# Altium PCB pcb.PcbDoc
Units mm, origin at the board's own origin, x right, y up, seen from the top; angles counter-clockwise.
Board outline 218.44 x 102.87 mm, 2 copper layers (Top Layer, Bottom Layer), stack 1.571 mm thick; 92 components, 51 nets, 287 pads, 52 vias.
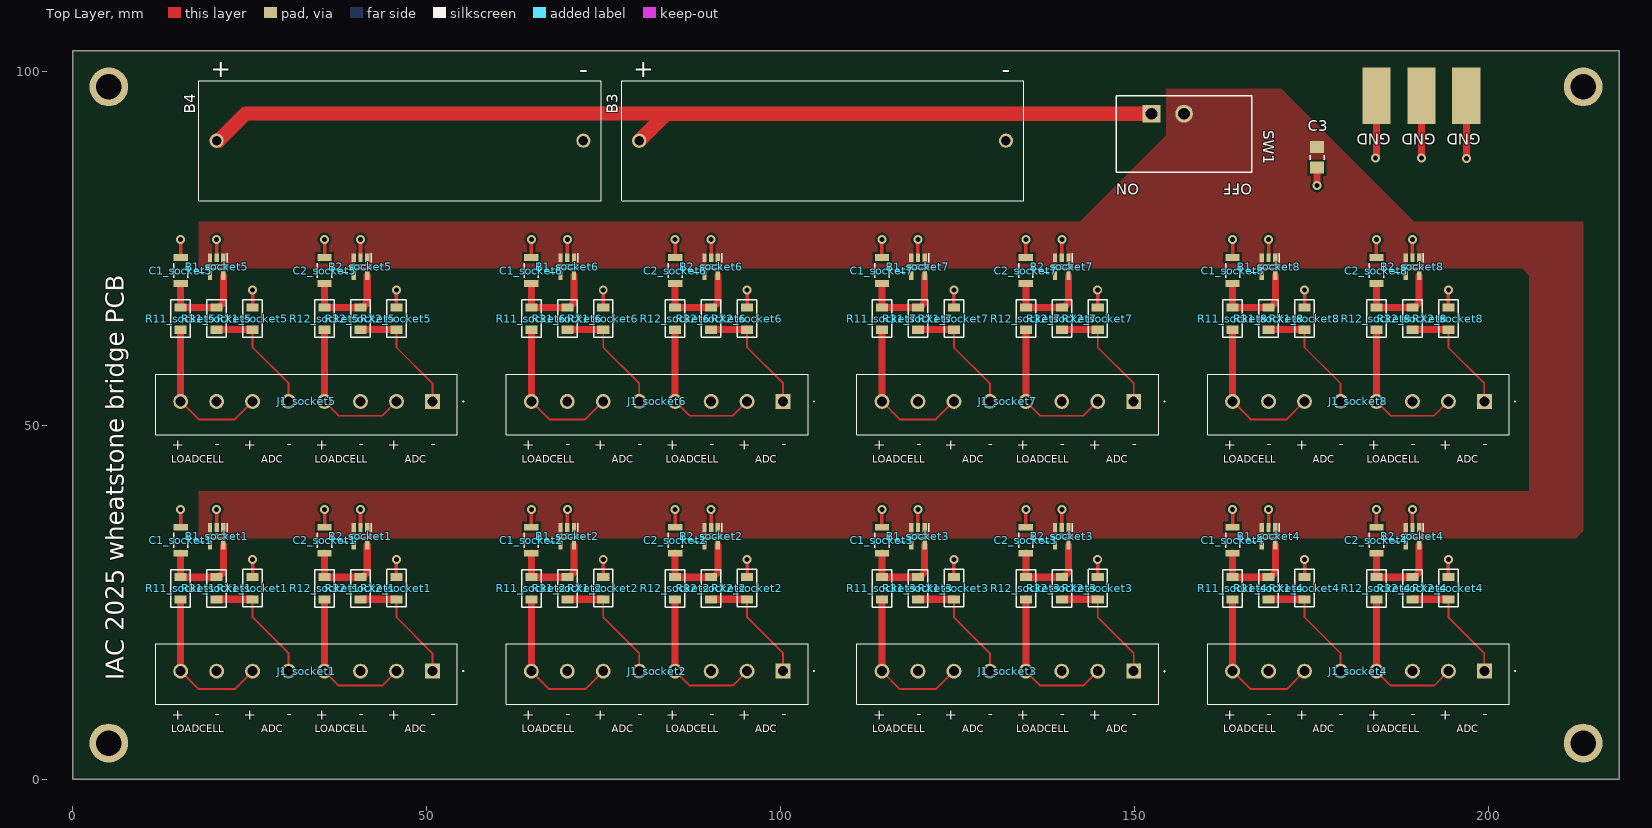
[diagram p0: Top Layer view]
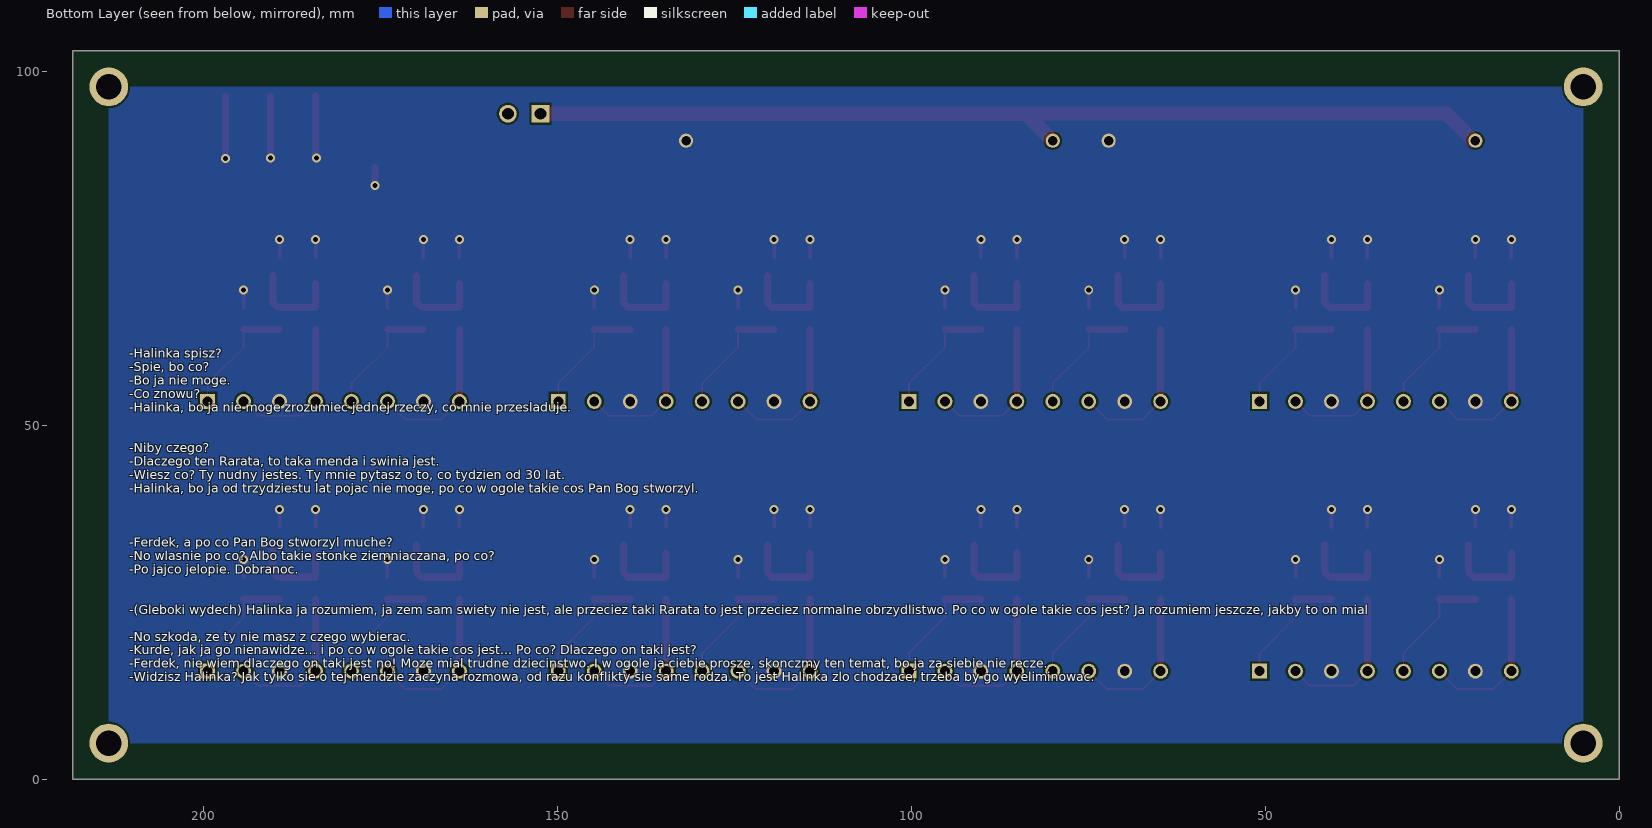
[diagram p1: Bottom Layer view, seen from below]

## Layer stack, top to bottom
Top Solder: solder mask 0.0102, Solder Resist, Dk 3.5
Top Layer: signal copper 0.0356
Dielectric 1: dielectric 1.5, FR-4, Dk 4.8
Bottom Layer: signal copper 0.0356
Bottom Solder: solder mask 0.0102, Solder Resist, Dk 3.5

## Board outline
0,0 0,102.87 218.44,102.87 218.44,0

## Design rules (kind name [scope] priority, off if disabled: settings)
BoardOutlineClearance [All] p1: gap=0.2 ignorepadtopadclearanceinfootprint=FALSE
Clearance [All] p1: gap=0.3 ignorepadtopadclearanceinfootprint=FALSE
ComponentClearance [All] p1: gap=0.01 collisioncheckmode=3 verticalgap=0.01 showdistances=FALSE
HoleSize [All] p1: absolutevalues=TRUE maxlimit=6.3 minlimit=0.15 maxpercent=80.000 minpercent=20.000
MinimumAnnularRing [All] p1: minimumring=0.025
MinimumSolderMaskSliver [All] p1: minsoldermaskwidth=0.1
PolygonConnect [All] p1: connectstyle=Direct reliefconductorwidth=0.254 reliefentries=4 polygonreliefangle="90 Angle" airgapwidth=0.254
RoutingVias [All] p1: holewidth=0.3 width=0.45 viastyle="Through Hole" minholewidth=0.15 minwidth=0.25 maxholewidth=1.5 maxwidth=2
SilkToSolderMaskClearance [IsPad] p1: minsilkscreentomaskgap=0.15 clearancetoexposedcopper=TRUE
SolderMaskExpansion [All] p1: expansion=0.038 istentingtop=FALSE
SupplyNets "Schematic Supply Nets_2" [InNet('GND')] p1: voltage=0.000
SupplyNets "Schematic Supply Nets" [InNet('+5')] p2: voltage=0.000
Width [All] p1: maxlimit=2 minlimit=0.16 preferedwidth=0.254 minimp=50.000000 maximp=50.000000 favimp=50.000000
26 further rules are at their usual default settings.

## Classes and differential pairs
channel class socket_2bridges: socket1 socket2 socket3 socket4 socket5 socket6 socket7 socket8
component class socket8: B1_socket8 B2 B2_socket8 C1_socket8 C2 C2_socket8 J1 J1_socket8 R11 R11_socket8 R12 R12_socket8 R31 R31_socket8 R32 R32_socket8 RX1 RX1_socket8 RX2 RX2_socket8
component class socket7: B1_socket7 B2 B2_socket7 C1_socket7 C2 C2_socket7 J1 J1_socket7 R11 R11_socket7 R12 R12_socket7 R31 R31_socket7 R32 R32_socket7 RX1 RX1_socket7 RX2 RX2_socket7
component class socket6: B1_socket6 B2 B2_socket6 C1_socket6 C2 C2_socket6 J1 J1_socket6 R11 R11_socket6 R12 R12_socket6 R31 R31_socket6 R32 R32_socket6 RX1 RX1_socket6 RX2 RX2_socket6
component class socket5: B1_socket5 B2 B2_socket5 C1_socket5 C2 C2_socket5 J1 J1_socket5 R11 R11_socket5 R12 R12_socket5 R31 R31_socket5 R32 R32_socket5 RX1 RX1_socket5 RX2 RX2_socket5
component class socket4: B1_socket4 B2 B2_socket4 C1_socket4 C2 C2_socket4 J1 J1_socket4 R11 R11_socket4 R12 R12_socket4 R31 R31_socket4 R32 R32_socket4 RX1 RX1_socket4 RX2 RX2_socket4
component class socket3: B1_socket3 B2 B2_socket3 C1_socket3 C2 C2_socket3 J1 J1_socket3 R11 R11_socket3 R12 R12_socket3 R31 R31_socket3 R32 R32_socket3 RX1 RX1_socket3 RX2 RX2_socket3
component class socket2: B1_socket2 B2 B2_socket2 C1_socket2 C2 C2_socket2 J1 J1_socket2 R11 R11_socket2 R12 R12_socket2 R31 R31_socket2 R32 R32_socket2 RX1 RX1_socket2 RX2 RX2_socket2
component class socket1: B1_socket1 B2 B2_socket1 C1_socket1 C2 C2_socket1 J1 J1_socket1 R11 R11_socket1 R12 R12_socket1 R31 R31_socket1 R32 R32_socket1 RX1 RX1_socket1 RX2 RX2_socket1
component class main: B3 B4 C3 SW1

## Components (designator, comment, footprint, x,y, rotation, side; value= is the part's Value field where it differs from the comment)
B1_socket1 "ADPL40502AUJZ-1.2-R7" SOT95P280X100-5N 20.32,34.29 r270 top (schematic designator B1)
B1_socket2 "ADPL40502AUJZ-1.2-R7" SOT95P280X100-5N 69.85,34.29 r270 top (schematic designator B1)
B1_socket3 "ADPL40502AUJZ-1.2-R7" SOT95P280X100-5N 119.38,34.29 r270 top (schematic designator B1)
B1_socket4 "ADPL40502AUJZ-1.2-R7" SOT95P280X100-5N 168.91,34.29 r270 top (schematic designator B1)
B1_socket5 "ADPL40502AUJZ-1.2-R7" SOT95P280X100-5N 20.32,72.39 r270 top (schematic designator B1)
B1_socket6 "ADPL40502AUJZ-1.2-R7" SOT95P280X100-5N 69.85,72.39 r270 top (schematic designator B1)
B1_socket7 "ADPL40502AUJZ-1.2-R7" SOT95P280X100-5N 119.38,72.39 r270 top (schematic designator B1)
B1_socket8 "ADPL40502AUJZ-1.2-R7" SOT95P280X100-5N 168.91,72.39 r270 top (schematic designator B1)
B2_socket1 "ADPL40502AUJZ-1.2-R7" SOT95P280X100-5N 40.64,34.29 r270 top (schematic designator B2)
B2_socket2 "ADPL40502AUJZ-1.2-R7" SOT95P280X100-5N 90.17,34.29 r270 top (schematic designator B2)
B2_socket3 "ADPL40502AUJZ-1.2-R7" SOT95P280X100-5N 139.7,34.29 r270 top (schematic designator B2)
B2_socket4 "ADPL40502AUJZ-1.2-R7" SOT95P280X100-5N 189.23,34.29 r270 top (schematic designator B2)
B2_socket5 "ADPL40502AUJZ-1.2-R7" SOT95P280X100-5N 40.64,72.39 r270 top (schematic designator B2)
B2_socket6 "ADPL40502AUJZ-1.2-R7" SOT95P280X100-5N 90.17,72.39 r270 top (schematic designator B2)
B2_socket7 "ADPL40502AUJZ-1.2-R7" SOT95P280X100-5N 139.7,72.39 r270 top (schematic designator B2)
B2_socket8 "ADPL40502AUJZ-1.2-R7" SOT95P280X100-5N 189.23,72.39 r270 top (schematic designator B2)
B3 "12BH311P-R-GR" 12BH311PRGR 80.01,90.17 r0 top
B4 "12BH311P-R-GR" 12BH311PRGR 20.32,90.17 r0 top
C1_socket1 "1uF" FP-CGA5L-0_3-0_1-IPC_A 15.24,33.735 r90 top (schematic designator C1)
C1_socket2 "1uF" FP-CGA5L-0_3-0_1-IPC_A 64.77,33.735 r90 top (schematic designator C1)
C1_socket3 "1uF" FP-CGA5L-0_3-0_1-IPC_A 114.3,33.735 r90 top (schematic designator C1)
C1_socket4 "1uF" FP-CGA5L-0_3-0_1-IPC_A 163.83,33.735 r90 top (schematic designator C1)
C1_socket5 "1uF" FP-CGA5L-0_3-0_1-IPC_A 15.24,71.835 r90 top (schematic designator C1)
C1_socket6 "1uF" FP-CGA5L-0_3-0_1-IPC_A 64.77,71.835 r90 top (schematic designator C1)
C1_socket7 "1uF" FP-CGA5L-0_3-0_1-IPC_A 114.3,71.835 r90 top (schematic designator C1)
C1_socket8 "1uF" FP-CGA5L-0_3-0_1-IPC_A 163.83,71.835 r90 top (schematic designator C1)
C2_socket1 "1uF" FP-CGA5L-0_3-0_1-IPC_A 35.56,33.735 r90 top (schematic designator C2)
C2_socket2 "1uF" FP-CGA5L-0_3-0_1-IPC_A 85.09,33.735 r90 top (schematic designator C2)
C2_socket3 "1uF" FP-CGA5L-0_3-0_1-IPC_A 134.62,33.735 r90 top (schematic designator C2)
C2_socket4 "1uF" FP-CGA5L-0_3-0_1-IPC_A 184.15,33.735 r90 top (schematic designator C2)
C2_socket5 "1uF" FP-CGA5L-0_3-0_1-IPC_A 35.56,71.835 r90 top (schematic designator C2)
C2_socket6 "1uF" FP-CGA5L-0_3-0_1-IPC_A 85.09,71.835 r90 top (schematic designator C2)
C2_socket7 "1uF" FP-CGA5L-0_3-0_1-IPC_A 134.62,71.835 r90 top (schematic designator C2)
C2_socket8 "1uF" FP-CGA5L-0_3-0_1-IPC_A 184.15,71.835 r90 top (schematic designator C2)
C3 "EMK316BC6226ML-T" FP-1206-L_3_2_0_3-W_1_6_0-IPC_A 175.768,87.81 r270 top
J1_socket1 "1755794" 1755794 50.8,15.24 r180 top (schematic designator J1)
J1_socket2 "1755794" 1755794 100.33,15.24 r180 top (schematic designator J1)
J1_socket3 "1755794" 1755794 149.86,15.24 r180 top (schematic designator J1)
J1_socket4 "1755794" 1755794 199.39,15.24 r180 top (schematic designator J1)
J1_socket5 "1755794" 1755794 50.8,53.34 r180 top (schematic designator J1)
J1_socket6 "1755794" 1755794 100.33,53.34 r180 top (schematic designator J1)
J1_socket7 "1755794" 1755794 149.86,53.34 r180 top (schematic designator J1)
J1_socket8 "1755794" 1755794 199.39,53.34 r180 top (schematic designator J1)
R11_socket1 "AR06BTCV1000" AR06 15.24,26.95 r90 top (schematic designator R11)
R11_socket2 "AR06BTCV1000" AR06 64.77,26.95 r90 top (schematic designator R11)
R11_socket3 "AR06BTCV1000" AR06 114.3,26.95 r90 top (schematic designator R11)
R11_socket4 "AR06BTCV1000" AR06 163.83,26.95 r90 top (schematic designator R11)
R11_socket5 "AR06BTCV1000" AR06 15.24,65.05 r90 top (schematic designator R11)
R11_socket6 "AR06BTCV1000" AR06 64.77,65.05 r90 top (schematic designator R11)
R11_socket7 "AR06BTCV1000" AR06 114.3,65.05 r90 top (schematic designator R11)
R11_socket8 "AR06BTCV1000" AR06 163.83,65.05 r90 top (schematic designator R11)
R12_socket1 "AR06BTCV1000" AR06 35.56,26.95 r90 top (schematic designator R12)
R12_socket2 "AR06BTCV1000" AR06 85.09,26.95 r90 top (schematic designator R12)
R12_socket3 "AR06BTCV1000" AR06 134.62,26.95 r90 top (schematic designator R12)
R12_socket4 "AR06BTCV1000" AR06 184.15,26.95 r90 top (schematic designator R12)
R12_socket5 "AR06BTCV1000" AR06 35.56,65.05 r90 top (schematic designator R12)
R12_socket6 "AR06BTCV1000" AR06 85.09,65.05 r90 top (schematic designator R12)
R12_socket7 "AR06BTCV1000" AR06 134.62,65.05 r90 top (schematic designator R12)
R12_socket8 "AR06BTCV1000" AR06 184.15,65.05 r90 top (schematic designator R12)
R31_socket1 "AR06BTCV1000" AR06 20.32,26.95 r90 top (schematic designator R31)
R31_socket2 "AR06BTCV1000" AR06 69.85,26.95 r90 top (schematic designator R31)
R31_socket3 "AR06BTCV1000" AR06 119.38,26.95 r90 top (schematic designator R31)
R31_socket4 "AR06BTCV1000" AR06 168.91,26.95 r90 top (schematic designator R31)
R31_socket5 "AR06BTCV1000" AR06 20.32,65.05 r90 top (schematic designator R31)
R31_socket6 "AR06BTCV1000" AR06 69.85,65.05 r90 top (schematic designator R31)
R31_socket7 "AR06BTCV1000" AR06 119.38,65.05 r90 top (schematic designator R31)
R31_socket8 "AR06BTCV1000" AR06 168.91,65.05 r90 top (schematic designator R31)
R32_socket1 "AR06BTCV1000" AR06 40.64,26.95 r90 top (schematic designator R32)
R32_socket2 "AR06BTCV1000" AR06 90.17,26.95 r90 top (schematic designator R32)
R32_socket3 "AR06BTCV1000" AR06 139.7,26.95 r90 top (schematic designator R32)
R32_socket4 "AR06BTCV1000" AR06 189.23,26.95 r90 top (schematic designator R32)
R32_socket5 "AR06BTCV1000" AR06 40.64,65.05 r90 top (schematic designator R32)
R32_socket6 "AR06BTCV1000" AR06 90.17,65.05 r90 top (schematic designator R32)
R32_socket7 "AR06BTCV1000" AR06 139.7,65.05 r90 top (schematic designator R32)
R32_socket8 "AR06BTCV1000" AR06 189.23,65.05 r90 top (schematic designator R32)
RX1_socket1 "AR06BTCV4R70" AR06 25.4,26.95 r270 top (schematic designator RX1)
RX1_socket2 "AR06BTCV4R70" AR06 74.93,26.95 r270 top (schematic designator RX1)
RX1_socket3 "AR06BTCV4R70" AR06 124.46,26.95 r270 top (schematic designator RX1)
RX1_socket4 "AR06BTCV4R70" AR06 173.99,26.95 r270 top (schematic designator RX1)
RX1_socket5 "AR06BTCV4R70" AR06 25.4,65.05 r270 top (schematic designator RX1)
RX1_socket6 "AR06BTCV4R70" AR06 74.93,65.05 r270 top (schematic designator RX1)
RX1_socket7 "AR06BTCV4R70" AR06 124.46,65.05 r270 top (schematic designator RX1)
RX1_socket8 "AR06BTCV4R70" AR06 173.99,65.05 r270 top (schematic designator RX1)
RX2_socket1 "AR06BTCV4R70" AR06 45.72,26.95 r270 top (schematic designator RX2)
RX2_socket2 "AR06BTCV4R70" AR06 95.25,26.95 r270 top (schematic designator RX2)
RX2_socket3 "AR06BTCV4R70" AR06 144.78,26.95 r270 top (schematic designator RX2)
RX2_socket4 "AR06BTCV4R70" AR06 194.31,26.95 r270 top (schematic designator RX2)
RX2_socket5 "AR06BTCV4R70" AR06 45.72,65.05 r270 top (schematic designator RX2)
RX2_socket6 "AR06BTCV4R70" AR06 95.25,65.05 r270 top (schematic designator RX2)
RX2_socket7 "AR06BTCV4R70" AR06 144.78,65.05 r270 top (schematic designator RX2)
RX2_socket8 "AR06BTCV4R70" AR06 194.31,65.05 r270 top (schematic designator RX2)
SW1 "L101011MS02Q" FP-L101011MS02Q-MFG 156.972,91.13 r270 top

## Footprints (in the part's own frame and the unit in brackets; to place one, negate y for a bottom-side part, rotate by r counter-clockwise, add the part's x,y. Pads: shape width x height; smd on the part's side, far side on the other; paste and mask are expansions set on the pad)
12BH311PRGR [mm]
  round 1.995 hole 1.33: 1(0,0) 2(51.8,0)
  silkscreen extent -2.5,-8.45 54.3,8.45, body extent -2.61,-8.38 54.29,8.51, height 13
1755794 [mm]
  rect 2.1x2.1 hole 1.4: 1(0,0)
  round 2.1 hole 1.4: 2(5.08,0) 3(10.16,0) 4(15.24,0) 5(20.32,0) 6(25.4,0) 7(30.48,0) 8(35.56,0)
  silkscreen extent -4.4,-3.87 39.1,4.7, body extent -3.4,-4.52 39.24,4.08, height 12.58
AR06 [mm]
  rect 1.15x1.7 smd: 1(-1.575,0) 2(1.575,0)
  silkscreen extent -2.68,-1.38 2.63,1.38, body extent -1.5,-0.75 1.55,0.8, height 0.55
FP-1206-L_3_2_0_3-W_1_6_0-IPC_A [mm]
  rect 1.703x2.004 smd paste+0 mask+0: 1(-1.45,0) 2(1.45,0)
  silkscreen extent -0.3,-1 0.3,1, body extent -2.8,-1.5 2.8,1.5, height 0.25
FP-CGA5L-0_3-0_1-IPC_A [mm]
  rect 0.956x2.006 smd paste+0 mask+0: 1(-1.825,0) 2(1.825,0)
  silkscreen extent -1.05,-1 1.05,1, body extent -2.8,-1.5 2.8,1.5, height 0.25
FP-L101011MS02Q-MFG [mm]
  rect 2.5x2.5 hole 1.65 paste-2539.97 mask+0: 1(-2.85,-4.6)
  round 2.5 hole 1.65 paste-2539.97 mask+0: 2(-2.85,0)
  silkscreen extent -5.4,-9.55 5.4,9.55, body extent -5.5,-9.65 5.5,9.65, height 0.25
SOT95P280X100-5N [mm]
  rect 1.25x0.6 smd: 1(-1.25,0.95) 2(-1.25,0) 3(-1.25,-0.95) 4(1.25,-0.95) 5(1.25,0.95)
  silkscreen extent -1.88,-1.45 0.28,1.5

## Part data
B1_socket1 B1_socket2 B1_socket3 B1_socket4 B1_socket5 B1_socket6 B1_socket7 B1_socket8 B2_socket1 B2_socket2 B2_socket3 B2_socket4 B2_socket5 B2_socket6 B2_socket7 B2_socket8: "Low Noise, 200mA, CMOS Linear Regulator", Manufacturer_Name="Analog Devices", Datasheet Link=https://www.analog.com/ADPL40502/datasheet, Geometry.Height=1mm, Manufacturer_Part_Number=ADPL40502AUJZ-1.2-R7
B3 B4: "Cylindrical Battery Contacts, Clips, Holders & Springs 1 \"AA\" PC LDS W/RIB", Manufacturer_Name="Eagle Plastic Devices", Geometry.Height=14.4mm, Manufacturer_Part_Number=12BH311P-R-GR, Mouser Part Number=12BH311P-R-GR, Mouser Price/Stock=https://www.mouser.co.uk/ProductDetail/Eagle-Plastic-Devices/12BH311P-R-GR?qs=xlWIvxljzP5Z0EAaeyyPGg%3D%3D
C1_socket1 C1_socket2 C1_socket3 C1_socket4 C1_socket5 C1_socket6 C1_socket7 C1_socket8 C2_socket1 C2_socket2 C2_socket3 C2_socket4 C2_socket5 C2_socket6 C2_socket7 C2_socket8: library part CMP-08246-001699-1, "Cap Ceramic 1uF 25V X7R 10% Pad SMD 1206 +125°C Automotive T/R", Case Code (Imperial)=1206, Case Code (Metric)=3216, Dielectric=X7R, Max Operating Temperature=125°C, Min Operating Temperature=-55°C, Package Quantity=2000, Ratings=AEC-Q200, Tolerance=10%, Voltage Rating=25V, Capacitance=1uF, Case/Package=1206, Composition=Ceramic, Depth=1.6mm, Height=1.6mm, Length=3.2mm, Mount="Surface Mount", Packaging="Tape and Reel", REACH SVHC="No SVHC", Termination=SMD/SMT, Thickness=0.075inch, Voltage Rating (DC)=25V, Weight=0.000571oz, Width=1.6mm
C3: library part CMP-14477-000320-2, "None", Capacitance=22uF, Case Code (Imperial)=1206, Case Code (Metric)=3216, Dielectric=X6S, Max Operating Temperature=105°C, Min Operating Temperature=-55°C, Tolerance=20%, Voltage Rating=16V, Case/Package=1206, Lead Free="Lead Free", Length=0.126inch, Mount="Surface Mount", Packaging="Tape and Reel", Thickness=0.071inch, Width=0.063inch
J1_socket1 J1_socket2 J1_socket3 J1_socket4 J1_socket5 J1_socket6 J1_socket7 J1_socket8: "Connector", Manufacturer_Name="Phoenix Contact", Mouser Part Number=651-1755794, Arrow Part Number=1755794, Arrow Price/Stock=https://www.arrow.com/en/products/1755794/phoenix-contact?utm_currency=USD&region=nac, Datasheet Link=http://www.phoenixcontact.com/de/produkte/1755794/pdf, Height=12.15mm, Manufacturer_Part_Number=1755794, Mouser Price/Stock=https://www.mouser.co.uk/ProductDetail/Phoenix-Contact/1755794?qs=wd%252Bw3mUqFrk%2FIOZ4HDo8lg%3D%3D
SW1: library part CMP-10038-000020-1, "SWITCH SLIDE SPST 4A 125V", Actuator Color=Black, Contact Current Rating=2A, Current Rating=4A, Max Operating Temperature=65°C, Max Voltage Rating (AC)=250V, Max Voltage Rating (DC)=125V, Min Operating Temperature=-30°C, Package Quantity=1, Voltage Rating (DC)=28V, Actuator Length=5.08mm, Actuator Material=Nylon, Actuator Type=Standard, Contact Material=Copper, Contact Plating=Silver, Depth=10.8mm, Electrical Life=10000Cycles, Housing Material=Nylon, Lead Free="Lead Free", Length=19.1mm, Max Current Rating=4A, Mount="Through Hole", Orientation=Straight, Packaging=Bulk, Radiation Hardening=No, RoHS Compliant=Yes, Series=L, Switch Function=On-Off, Switch Travel=3.81mm, Termination="PC Pins", Throw Configuration=SPST, Voltage Rating (AC)=125V

## Free pads (board coordinates)
  round 5.5 hole 3.6: MH1(5.08,5.08) MH2(5.08,97.79) MH3(213.36,97.79) MH4(213.36,5.08)
  rect 4x8 smd: RPI_GND_1(184.15,96.52) RPI_GND_2(190.5,96.52) RPI_GND_3(196.85,96.52)

## Via types
v1: diameter 1.27, hole 0.711, Top Layer to Bottom Layer, 52 vias

## Nets (pads, with @x,y where several pads share a name; then routed paths per layer and width w, separated by ;. In a path a pad name is that pad's centre, name@x,y a point inside that pad or via, vN(x,y) a via of type N, cw(c..) or ccw(c..) an arc to the next point about the centre after c; other vN are vias at no path point)
ADC_N1_socket1: J1_socket1.5 R31_socket1.1 RX1_socket1.2 | length 17.3
  Top Layer w0.254: RX1_socket1.2@25.4,25.4 25.4,22.86 30.48,17.78 J1_socket1.5
  Top Layer w1: R31_socket1.1@20.32,25.4 RX1_socket1.2@25.4,25.4
ADC_N1_socket2: J1_socket2.5 R31_socket2.1 RX1_socket2.2 | length 17.3
  Top Layer w0.254: RX1_socket2.2@74.93,25.4 74.93,22.86 80.01,17.78 J1_socket2.5
  Top Layer w1: R31_socket2.1@69.85,25.4 RX1_socket2.2@74.93,25.4
ADC_N1_socket3: J1_socket3.5 R31_socket3.1 RX1_socket3.2 | length 17.3
  Top Layer w0.254: RX1_socket3.2@124.46,25.4 124.46,22.86 129.54,17.78 J1_socket3.5
  Top Layer w1: R31_socket3.1@119.38,25.4 RX1_socket3.2@124.46,25.4
ADC_N1_socket4: J1_socket4.5 R31_socket4.1 RX1_socket4.2 | length 17.3
  Top Layer w0.254: RX1_socket4.2@173.99,25.4 173.99,22.86 179.07,17.78 J1_socket4.5
  Top Layer w1: R31_socket4.1@168.91,25.4 RX1_socket4.2@173.99,25.4
ADC_N1_socket5: J1_socket5.5 R31_socket5.1 RX1_socket5.2 | length 17.3
  Top Layer w0.254: RX1_socket5.2@25.4,63.5 25.4,60.96 30.48,55.88 J1_socket5.5
  Top Layer w1: R31_socket5.1@20.32,63.5 RX1_socket5.2@25.4,63.5
ADC_N1_socket6: J1_socket6.5 R31_socket6.1 RX1_socket6.2 | length 17.3
  Top Layer w0.254: RX1_socket6.2@74.93,63.5 74.93,60.96 80.01,55.88 J1_socket6.5
  Top Layer w1: R31_socket6.1@69.85,63.5 RX1_socket6.2@74.93,63.5
ADC_N1_socket7: J1_socket7.5 R31_socket7.1 RX1_socket7.2 | length 17.3
  Top Layer w0.254: RX1_socket7.2@124.46,63.5 124.46,60.96 129.54,55.88 J1_socket7.5
  Top Layer w1: R31_socket7.1@119.38,63.5 RX1_socket7.2@124.46,63.5
ADC_N1_socket8: J1_socket8.5 R31_socket8.1 RX1_socket8.2 | length 17.3
  Top Layer w0.254: RX1_socket8.2@173.99,63.5 173.99,60.96 179.07,55.88 J1_socket8.5
  Top Layer w1: R31_socket8.1@168.91,63.5 RX1_socket8.2@173.99,63.5
ADC_N2_socket1: J1_socket1.1 R32_socket1.1 RX2_socket1.2 | length 17.3
  Top Layer w0.254: RX2_socket1.2@45.72,25.4 45.72,22.86 50.8,17.78 J1_socket1.1
  Top Layer w1: R32_socket1.1@40.64,25.4 RX2_socket1.2@45.72,25.4
ADC_N2_socket2: J1_socket2.1 R32_socket2.1 RX2_socket2.2 | length 17.3
  Top Layer w0.254: RX2_socket2.2@95.25,25.4 95.25,22.86 100.33,17.78 J1_socket2.1
  Top Layer w1: R32_socket2.1@90.17,25.4 RX2_socket2.2@95.25,25.4
ADC_N2_socket3: J1_socket3.1 R32_socket3.1 RX2_socket3.2 | length 17.3
  Top Layer w0.254: RX2_socket3.2@144.78,25.4 144.78,22.86 149.86,17.78 J1_socket3.1
  Top Layer w1: R32_socket3.1@139.7,25.4 RX2_socket3.2@144.78,25.4
ADC_N2_socket4: J1_socket4.1 R32_socket4.1 RX2_socket4.2 | length 17.3
  Top Layer w0.254: RX2_socket4.2@194.31,25.4 194.31,22.86 199.39,17.78 J1_socket4.1
  Top Layer w1: R32_socket4.1@189.23,25.4 RX2_socket4.2@194.31,25.4
ADC_N2_socket5: J1_socket5.1 R32_socket5.1 RX2_socket5.2 | length 17.3
  Top Layer w0.254: RX2_socket5.2@45.72,63.5 45.72,60.96 50.8,55.88 J1_socket5.1
  Top Layer w1: R32_socket5.1@40.64,63.5 RX2_socket5.2@45.72,63.5
ADC_N2_socket6: J1_socket6.1 R32_socket6.1 RX2_socket6.2 | length 17.3
  Top Layer w0.254: RX2_socket6.2@95.25,63.5 95.25,60.96 100.33,55.88 J1_socket6.1
  Top Layer w1: R32_socket6.1@90.17,63.5 RX2_socket6.2@95.25,63.5
ADC_N2_socket7: J1_socket7.1 R32_socket7.1 RX2_socket7.2 | length 17.3
  Top Layer w0.254: RX2_socket7.2@144.78,63.5 144.78,60.96 149.86,55.88 J1_socket7.1
  Top Layer w1: R32_socket7.1@139.7,63.5 RX2_socket7.2@144.78,63.5
ADC_N2_socket8: J1_socket8.1 R32_socket8.1 RX2_socket8.2 | length 17.3
  Top Layer w0.254: RX2_socket8.2@194.31,63.5 194.31,60.96 199.39,55.88 J1_socket8.1
  Top Layer w1: R32_socket8.1@189.23,63.5 RX2_socket8.2@194.31,63.5
ADC_P1_socket1: J1_socket1.6 J1_socket1.8 R11_socket1.1 | length 22.4
  Top Layer w0.254: J1_socket1.8 17.78,12.7 22.86,12.7 J1_socket1.6
  Top Layer w1: J1_socket1.8 R11_socket1.1@15.24,25.4
ADC_P1_socket2: J1_socket2.6 J1_socket2.8 R11_socket2.1 | length 22.4
  Top Layer w0.254: J1_socket2.8 67.31,12.7 72.39,12.7 J1_socket2.6
  Top Layer w1: J1_socket2.8 R11_socket2.1@64.77,25.4
ADC_P1_socket3: J1_socket3.6 J1_socket3.8 R11_socket3.1 | length 22.4
  Top Layer w0.254: J1_socket3.8 116.84,12.7 121.92,12.7 J1_socket3.6
  Top Layer w1: J1_socket3.8 R11_socket3.1@114.3,25.4
ADC_P1_socket4: J1_socket4.6 J1_socket4.8 R11_socket4.1 | length 22.4
  Top Layer w0.254: J1_socket4.8 166.37,12.7 171.45,12.7 J1_socket4.6
  Top Layer w1: J1_socket4.8 R11_socket4.1@163.83,25.4
ADC_P1_socket5: J1_socket5.6 J1_socket5.8 R11_socket5.1 | length 22.4
  Top Layer w0.254: J1_socket5.8 17.78,50.8 22.86,50.8 J1_socket5.6
  Top Layer w1: J1_socket5.8 R11_socket5.1@15.24,63.5
ADC_P1_socket6: J1_socket6.6 J1_socket6.8 R11_socket6.1 | length 22.4
  Top Layer w0.254: J1_socket6.8 67.31,50.8 72.39,50.8 J1_socket6.6
  Top Layer w1: J1_socket6.8 R11_socket6.1@64.77,63.5
ADC_P1_socket7: J1_socket7.6 J1_socket7.8 R11_socket7.1 | length 22.4
  Top Layer w0.254: J1_socket7.8 116.84,50.8 121.92,50.8 J1_socket7.6
  Top Layer w1: J1_socket7.8 R11_socket7.1@114.3,63.5
ADC_P1_socket8: J1_socket8.6 J1_socket8.8 R11_socket8.1 | length 22.4
  Top Layer w0.254: J1_socket8.8 166.37,50.8 171.45,50.8 J1_socket8.6
  Top Layer w1: J1_socket8.8 R11_socket8.1@163.83,63.5
ADC_P2_socket1: J1_socket1.2 J1_socket1.4 R12_socket1.1 | length 22
  Top Layer w0.254: J1_socket1.4 37.592,13.208 43.688,13.208 J1_socket1.2
  Top Layer w1: J1_socket1.4 R12_socket1.1@35.56,25.4
ADC_P2_socket2: J1_socket2.2 J1_socket2.4 R12_socket2.1 | length 22
  Top Layer w0.254: J1_socket2.4 87.122,13.208 93.218,13.208 J1_socket2.2
  Top Layer w1: J1_socket2.4 R12_socket2.1@85.09,25.4
ADC_P2_socket3: J1_socket3.2 J1_socket3.4 R12_socket3.1 | length 22
  Top Layer w0.254: J1_socket3.4 136.652,13.208 142.748,13.208 J1_socket3.2
  Top Layer w1: J1_socket3.4 R12_socket3.1@134.62,25.4
ADC_P2_socket4: J1_socket4.2 J1_socket4.4 R12_socket4.1 | length 22
  Top Layer w0.254: J1_socket4.4 186.182,13.208 192.278,13.208 J1_socket4.2
  Top Layer w1: J1_socket4.4 R12_socket4.1@184.15,25.4
ADC_P2_socket5: J1_socket5.2 J1_socket5.4 R12_socket5.1 | length 22
  Top Layer w0.254: J1_socket5.4 37.592,51.308 43.688,51.308 J1_socket5.2
  Top Layer w1: J1_socket5.4 R12_socket5.1@35.56,63.5
ADC_P2_socket6: J1_socket6.2 J1_socket6.4 R12_socket6.1 | length 22
  Top Layer w0.254: J1_socket6.4 87.122,51.308 93.218,51.308 J1_socket6.2
  Top Layer w1: J1_socket6.4 R12_socket6.1@85.09,63.5
ADC_P2_socket7: J1_socket7.2 J1_socket7.4 R12_socket7.1 | length 22
  Top Layer w0.254: J1_socket7.4 136.652,51.308 142.748,51.308 J1_socket7.2
  Top Layer w1: J1_socket7.4 R12_socket7.1@134.62,63.5
ADC_P2_socket8: J1_socket8.2 J1_socket8.4 R12_socket8.1 | length 22
  Top Layer w0.254: J1_socket8.4 186.182,51.308 192.278,51.308 J1_socket8.2
  Top Layer w1: J1_socket8.4 R12_socket8.1@184.15,63.5
LOADCELL_N1_socket1: B1_socket1.2 B1_socket2.2 B1_socket3.2 B1_socket4.2 B1_socket5.2 B1_socket6.2 B1_socket7.2 B1_socket8.2 B2_socket1.2 B2_socket2.2 B2_socket3.2 B2_socket4.2 B2_socket5.2 B2_socket6.2 B2_socket7.2 B2_socket8.2 B3.2 B4.2 C1_socket1.2 C1_socket2.2 C1_socket3.2 C1_socket4.2 C1_socket5.2 C1_socket6.2 C1_socket7.2 C1_socket8.2 C2_socket1.2 C2_socket2.2 C2_socket3.2 C2_socket4.2 C2_socket5.2 C2_socket6.2 C2_socket7.2 C2_socket8.2 C3.2 J1_socket1.3 J1_socket1.7 J1_socket2.3 J1_socket2.7 J1_socket3.3 J1_socket3.7 J1_socket4.3 J1_socket4.7 J1_socket5.3 J1_socket5.7 J1_socket6.3 J1_socket6.7 J1_socket7.3 J1_socket7.7 J1_socket8.3 J1_socket8.7 pad.RPI_GND_1 pad.RPI_GND_2 pad.RPI_GND_3 RX1_socket1.1 RX1_socket2.1 RX1_socket3.1 RX1_socket4.1 RX1_socket5.1 RX1_socket6.1 RX1_socket7.1 RX1_socket8.1 RX2_socket1.1 RX2_socket2.1 RX2_socket3.1 RX2_socket4.1 RX2_socket5.1 RX2_socket6.1 RX2_socket7.1 RX2_socket8.1 | length 150.4
  Top Layer w0.5: C1_socket1.2 v1(15.24,38.1) ; C1_socket5.2 v1(15.24,76.2) ; B1_socket1.2 v1(20.32,38.1) ; B1_socket5.2 v1(20.32,76.2) ; RX1_socket1.1@25.4,28.5 v1(25.4,30.988) ; RX1_socket5.1@25.4,66.6 v1(25.4,69.088) ; C2_socket1.2 v1(35.56,38.1) ; C2_socket5.2 v1(35.56,76.2) ; B2_socket1.2 v1(40.64,38.1) ; B2_socket5.2 v1(40.64,76.2) ; RX2_socket1.1@45.72,28.5 v1(45.72,30.988) ; RX2_socket5.1@45.72,66.6 v1(45.72,69.088) ; C1_socket2.2 v1(64.77,38.1) ; C1_socket6.2 v1(64.77,76.2) ; B1_socket2.2 v1(69.85,38.1) ; B1_socket6.2 v1(69.85,76.2) ; RX1_socket2.1@74.93,28.5 v1(74.93,30.988) ; RX1_socket6.1@74.93,66.6 v1(74.93,69.088) ; C2_socket2.2 v1(85.09,38.1) ; C2_socket6.2 v1(85.09,76.2) ; B2_socket2.2 v1(90.17,38.1) ; B2_socket6.2 v1(90.17,76.2) ; RX2_socket2.1@95.25,28.5 v1(95.25,30.988) ; RX2_socket6.1@95.25,66.6 v1(95.25,69.088) ; C1_socket3.2 v1(114.3,38.1) ; C1_socket7.2 v1(114.3,76.2) ; B1_socket3.2 v1(119.38,38.1) ; B1_socket7.2 v1(119.38,76.2) ; RX1_socket3.1@124.46,28.5 v1(124.46,30.988) ; RX1_socket7.1@124.46,66.6 v1(124.46,69.088) ; C2_socket3.2 v1(134.62,38.1) ; C2_socket7.2 v1(134.62,76.2) ; B2_socket3.2 v1(139.7,38.1) ; B2_socket7.2 v1(139.7,76.2) ; RX2_socket3.1@144.78,28.5 v1(144.78,30.988) ; RX2_socket7.1@144.78,66.6 v1(144.78,69.088) ; C1_socket4.2 v1(163.83,38.1) ; C1_socket8.2 v1(163.83,76.2) ; B1_socket4.2 v1(168.91,38.1) ; B1_socket8.2 v1(168.91,76.2) ; RX1_socket4.1@173.99,28.5 v1(173.99,30.988) ; RX1_socket8.1@173.99,66.6 v1(173.99,69.088) ; C2_socket4.2 v1(184.15,38.1) ; C2_socket8.2 v1(184.15,76.2) ; B2_socket4.2 v1(189.23,38.1) ; B2_socket8.2 v1(189.23,76.2) ; RX2_socket4.1@194.31,28.5 v1(194.31,30.988) ; RX2_socket8.1@194.31,66.6 v1(194.31,69.088)
  Top Layer w1: v1(175.768,83.82) C3.2 ; v1(184.023,87.757) 184.023,87.83 184.15,87.957 pad.RPI_GND_1 ; v1(190.5,87.757) pad.RPI_GND_2 ; v1(196.85,87.63) pad.RPI_GND_3
NetB1_socket1_5: B1_socket1.5 C1_socket1.1 R11_socket1.2 R31_socket1.2 | length 13.3
  Top Layer w1: C1_socket1.1 15.24,28.5 R31_socket1.2@20.32,28.5 ; R31_socket1.2@20.595,28.5 21.27,29.175 B1_socket1.5
NetB1_socket2_5: B1_socket2.5 C1_socket2.1 R11_socket2.2 R31_socket2.2 | length 13.3
  Top Layer w1: C1_socket2.1 64.77,28.5 R31_socket2.2@69.85,28.5 ; R31_socket2.2@70.125,28.5 70.8,29.175 B1_socket2.5
NetB1_socket3_5: B1_socket3.5 C1_socket3.1 R11_socket3.2 R31_socket3.2 | length 13.3
  Top Layer w1: C1_socket3.1 114.3,28.5 R31_socket3.2@119.38,28.5 ; R31_socket3.2@119.655,28.5 120.33,29.175 B1_socket3.5
NetB1_socket4_5: B1_socket4.5 C1_socket4.1 R11_socket4.2 R31_socket4.2 | length 13.3
  Top Layer w1: C1_socket4.1 163.83,28.5 R31_socket4.2@168.91,28.5 ; R31_socket4.2@169.185,28.5 169.86,29.175 B1_socket4.5
NetB1_socket5_5: B1_socket5.5 C1_socket5.1 R11_socket5.2 R31_socket5.2 | length 13.3
  Top Layer w1: C1_socket5.1 15.24,66.6 R31_socket5.2@20.32,66.6 ; R31_socket5.2@20.595,66.6 21.27,67.275 B1_socket5.5
NetB1_socket6_5: B1_socket6.5 C1_socket6.1 R11_socket6.2 R31_socket6.2 | length 13.3
  Top Layer w1: C1_socket6.1 64.77,66.6 R31_socket6.2@69.85,66.6 ; R31_socket6.2@70.125,66.6 70.8,67.275 B1_socket6.5
NetB1_socket7_5: B1_socket7.5 C1_socket7.1 R11_socket7.2 R31_socket7.2 | length 13.3
  Top Layer w1: C1_socket7.1 114.3,66.6 R31_socket7.2@119.38,66.6 ; R31_socket7.2@119.655,66.6 120.33,67.275 B1_socket7.5
NetB1_socket8_5: B1_socket8.5 C1_socket8.1 R11_socket8.2 R31_socket8.2 | length 13.3
  Top Layer w1: C1_socket8.1 163.83,66.6 R31_socket8.2@168.91,66.6 ; R31_socket8.2@169.185,66.6 169.86,67.275 B1_socket8.5
NetB2_socket1_5: B2_socket1.5 C2_socket1.1 R12_socket1.2 R32_socket1.2 | length 13.3
  Top Layer w1: C2_socket1.1 35.56,28.5 40.503,28.5 R32_socket1.2@40.559,28.556 ; R32_socket1.2@40.915,28.5 41.59,29.175 B2_socket1.5
NetB2_socket2_5: B2_socket2.5 C2_socket2.1 R12_socket2.2 R32_socket2.2 | length 13.3
  Top Layer w1: C2_socket2.1 85.09,28.5 90.033,28.5 R32_socket2.2@90.089,28.556 ; R32_socket2.2@90.445,28.5 91.12,29.175 B2_socket2.5
NetB2_socket3_5: B2_socket3.5 C2_socket3.1 R12_socket3.2 R32_socket3.2 | length 13.3
  Top Layer w1: C2_socket3.1 134.62,28.5 139.563,28.5 R32_socket3.2@139.619,28.556 ; R32_socket3.2@139.975,28.5 140.65,29.175 B2_socket3.5
NetB2_socket4_5: B2_socket4.5 C2_socket4.1 R12_socket4.2 R32_socket4.2 | length 13.3
  Top Layer w1: C2_socket4.1 184.15,28.5 189.093,28.5 R32_socket4.2@189.149,28.556 ; R32_socket4.2@189.505,28.5 190.18,29.175 B2_socket4.5
NetB2_socket5_5: B2_socket5.5 C2_socket5.1 R12_socket5.2 R32_socket5.2 | length 13.3
  Top Layer w1: C2_socket5.1 35.56,66.6 40.503,66.6 R32_socket5.2@40.559,66.656 ; R32_socket5.2@40.915,66.6 41.59,67.275 B2_socket5.5
NetB2_socket6_5: B2_socket6.5 C2_socket6.1 R12_socket6.2 R32_socket6.2 | length 13.3
  Top Layer w1: C2_socket6.1 85.09,66.6 90.033,66.6 R32_socket6.2@90.089,66.656 ; R32_socket6.2@90.445,66.6 91.12,67.275 B2_socket6.5
NetB2_socket7_5: B2_socket7.5 C2_socket7.1 R12_socket7.2 R32_socket7.2 | length 13.3
  Top Layer w1: C2_socket7.1 134.62,66.6 139.563,66.6 R32_socket7.2@139.619,66.656 ; R32_socket7.2@139.975,66.6 140.65,67.275 B2_socket7.5
NetB2_socket8_5: B2_socket8.5 C2_socket8.1 R12_socket8.2 R32_socket8.2 | length 13.3
  Top Layer w1: C2_socket8.1 184.15,66.6 189.093,66.6 R32_socket8.2@189.149,66.656 ; R32_socket8.2@189.505,66.6 190.18,67.275 B2_socket8.5
NetB3_1: B3.1 B4.1 SW1.1 | length 139.1
  Top Layer w2: B4.1 20.574,90.17 24.433,94.029 83.82,94.029 83.82,93.98 ; B3.1 83.82,93.98 ; SW1.1 83.82,93.98
VCC: B1_socket1.1 B1_socket1.3 B1_socket2.1 B1_socket2.3 B1_socket3.1 B1_socket3.3 B1_socket4.1 B1_socket4.3 B1_socket5.1 B1_socket5.3 B1_socket6.1 B1_socket6.3 B1_socket7.1 B1_socket7.3 B1_socket8.1 B1_socket8.3 B2_socket1.1 B2_socket1.3 B2_socket2.1 B2_socket2.3 B2_socket3.1 B2_socket3.3 B2_socket4.1 B2_socket4.3 B2_socket5.1 B2_socket5.3 B2_socket6.1 B2_socket6.3 B2_socket7.1 B2_socket7.3 B2_socket8.1 B2_socket8.3 C3.1 SW1.2
pads on no net: B1_socket1.4 B1_socket2.4 B1_socket3.4 B1_socket4.4 B1_socket5.4 B1_socket6.4 B1_socket7.4 B1_socket8.4 B2_socket1.4 B2_socket2.4 B2_socket3.4 B2_socket4.4 B2_socket5.4 B2_socket6.4 B2_socket7.4 B2_socket8.4

## Polygon pours and split planes (outlines as drawn)
LOADCELL_N1_socket1 on Bottom Layer "LOADCELL_N1_SOCKET1_L02_P001" (solid, pour order 1): 5.08,97.79 213.36,97.79 213.36,5.08 5.08,5.08
VCC on Top Layer "VCC_L01_P002" (solid, pour order 2): 17.78,72.136 17.78,78.74 142.24,78.74 154.432,90.932 154.432,97.536 170.688,97.536 189.484,78.74 213.36,78.74 213.36,35.052 212.344,34.036 17.78,34.036 17.78,40.64 205.74,40.64 205.74,71.12 204.724,72.136

## Silkscreen, mask and mechanical layers (free items; w line width, h text height)
Top Overlay:
  text "+" at 19.474,99.145 h2.54
  text "+" at 79.164,99.145 h2.54
  text "-" at 71.544,99.06 h2.54
  text "-" at 131.234,99.06 h2.54
  text "GND" at 186.181,91.186 h1.52 r180
  text "GND" at 192.531,91.186 h1.52 r180
  text "GND" at 198.881,91.186 h1.52 r180
  text "ON" at 150.622,84.074 h1.52 r180
  text "OFF" at 166.623,84.074 h1.52 r180
  text "IAC 2025 wheatstone bridge PCB" at 7.196,13.982 h2.54 r90
Bottom Overlay:
  text "-Halinka spisz? / -Spie, bo co? / -Bo ja nie moge. / -Co znowu? / -Halinka, bo ja nie moge zrozumiec jednej rzeczy, co mnie przesladuje. /  /  / -Niby czego? / -Dlaczego ten Rarata, to taka menda i swinia jest. / -Wiesz co? Ty nudny jestes. Ty mnie pytasz o to, co tydzien od 30 lat. / -Halinka, bo ja od trzydziestu lat pojac nie moge, po co w ogole takie cos Pan Bog stworzyl. /  /  /  / -Ferdek, a po co Pan Bog stworzyl muche? / -No wlasnie po co? Albo takie stonke ziemniaczana, po co? / -Po jajco jelopie. Dobranoc. /  /  / -(Gleboki wydech) Halinka ja rozumiem, ja zem sam swiety nie jest, ale przeciez taki Rarata to jest przeciez normalne obrzydlistwo. Po co w ogole takie cos jest? Ja rozumiem jeszcze, jakby to on mial zle. Ale co, mieszkanie ma, samochod ma, telewizor ma, pieniadze w bankomacie ma. Sam, zem widzial jak wybieral. /  / -No szkoda, ze ty nie masz z czego wybierac. / -Kurde, jak ja go nienawidze... i po co w ogole takie cos jest... Po co? Dlaczego on taki jest? / -Ferdek, nie wiem dlaczego on taki jest no! Moze mial trudne dziecinstwo. I w ogole ja ciebie prosze, skonczmy ten temat, bo ja za siebie nie recze. / -Widzisz Halinka? Jak tylko sie o tej mendzie zaczyna rozmowa, od razu konflikty sie same rodza. To jest Halinka zlo chodzace, trzeba by go wyeliminowac." at 210.477,13.784 h1.27

## Text inside footprints (layer, text, board x,y; h text height)
J1_socket1: Top Overlay "+" at 46.228,9.652 h1.52 r180; Top Overlay "+" at 36.068,9.652 h1.52 r180; Top Overlay "+" at 25.908,9.652 h1.52 r180; Top Overlay "+" at 15.748,9.652 h1.52 r180; Top Overlay "ADC" at 26.586,6.604 h1.02; Top Overlay "LOADCELL" at 13.887,6.604 h1.02; Top Overlay "ADC" at 46.906,6.604 h1.02; Top Overlay "LOADCELL" at 34.207,6.604 h1.02; Top Overlay "-" at 20.828,9.652 h1.52 r180; Top Overlay "-" at 30.988,9.652 h1.52 r180; Top Overlay "-" at 41.148,9.652 h1.52 r180; Top Overlay "-" at 51.308,9.652 h1.52 r180
J1_socket2: Top Overlay "-" at 100.838,9.652 h1.52 r180; Top Overlay "-" at 90.678,9.652 h1.52 r180; Top Overlay "-" at 80.518,9.652 h1.52 r180; Top Overlay "-" at 70.358,9.652 h1.52 r180; Top Overlay "LOADCELL" at 83.737,6.604 h1.02; Top Overlay "ADC" at 96.436,6.604 h1.02; Top Overlay "LOADCELL" at 63.417,6.604 h1.02; Top Overlay "ADC" at 76.116,6.604 h1.02; Top Overlay "+" at 65.278,9.652 h1.52 r180; Top Overlay "+" at 75.438,9.652 h1.52 r180; Top Overlay "+" at 85.598,9.652 h1.52 r180; Top Overlay "+" at 95.758,9.652 h1.52 r180
J1_socket3: Top Overlay "+" at 145.288,9.652 h1.52 r180; Top Overlay "+" at 135.128,9.652 h1.52 r180; Top Overlay "+" at 124.968,9.652 h1.52 r180; Top Overlay "+" at 114.808,9.652 h1.52 r180; Top Overlay "ADC" at 125.646,6.604 h1.02; Top Overlay "LOADCELL" at 112.947,6.604 h1.02; Top Overlay "ADC" at 145.966,6.604 h1.02; Top Overlay "LOADCELL" at 133.267,6.604 h1.02; Top Overlay "-" at 119.888,9.652 h1.52 r180; Top Overlay "-" at 130.048,9.652 h1.52 r180; Top Overlay "-" at 140.208,9.652 h1.52 r180; Top Overlay "-" at 150.368,9.652 h1.52 r180
J1_socket4: Top Overlay "+" at 194.818,9.652 h1.52 r180; Top Overlay "+" at 184.658,9.652 h1.52 r180; Top Overlay "+" at 174.498,9.652 h1.52 r180; Top Overlay "+" at 164.338,9.652 h1.52 r180; Top Overlay "ADC" at 175.176,6.604 h1.02; Top Overlay "LOADCELL" at 162.477,6.604 h1.02; Top Overlay "ADC" at 195.496,6.604 h1.02; Top Overlay "LOADCELL" at 182.797,6.604 h1.02; Top Overlay "-" at 169.418,9.652 h1.52 r180; Top Overlay "-" at 179.578,9.652 h1.52 r180; Top Overlay "-" at 189.738,9.652 h1.52 r180; Top Overlay "-" at 199.898,9.652 h1.52 r180
J1_socket5: Top Overlay "+" at 46.228,47.752 h1.52 r180; Top Overlay "+" at 36.068,47.752 h1.52 r180; Top Overlay "+" at 25.908,47.752 h1.52 r180; Top Overlay "+" at 15.748,47.752 h1.52 r180; Top Overlay "ADC" at 26.586,44.704 h1.02; Top Overlay "ADC" at 46.906,44.704 h1.02; Top Overlay "LOADCELL" at 34.207,44.704 h1.02; Top Overlay "-" at 20.828,47.752 h1.52 r180; Top Overlay "-" at 30.988,47.752 h1.52 r180; Top Overlay "-" at 41.148,47.752 h1.52 r180; Top Overlay "-" at 51.308,47.752 h1.52 r180; Top Overlay "LOADCELL" at 13.887,44.704 h1.02
J1_socket6: Top Overlay "+" at 95.758,47.752 h1.52 r180; Top Overlay "+" at 85.598,47.752 h1.52 r180; Top Overlay "+" at 75.438,47.752 h1.52 r180; Top Overlay "+" at 65.278,47.752 h1.52 r180; Top Overlay "ADC" at 76.116,44.704 h1.02; Top Overlay "LOADCELL" at 63.417,44.704 h1.02; Top Overlay "ADC" at 96.436,44.704 h1.02; Top Overlay "LOADCELL" at 83.737,44.704 h1.02; Top Overlay "-" at 70.358,47.752 h1.52 r180; Top Overlay "-" at 80.518,47.752 h1.52 r180; Top Overlay "-" at 90.678,47.752 h1.52 r180; Top Overlay "-" at 100.838,47.752 h1.52 r180
J1_socket7: Top Overlay "+" at 145.288,47.752 h1.52 r180; Top Overlay "+" at 135.128,47.752 h1.52 r180; Top Overlay "+" at 124.968,47.752 h1.52 r180; Top Overlay "+" at 114.808,47.752 h1.52 r180; Top Overlay "ADC" at 125.646,44.704 h1.02; Top Overlay "LOADCELL" at 112.947,44.704 h1.02; Top Overlay "ADC" at 145.966,44.704 h1.02; Top Overlay "LOADCELL" at 133.267,44.704 h1.02; Top Overlay "-" at 119.888,47.752 h1.52 r180; Top Overlay "-" at 130.048,47.752 h1.52 r180; Top Overlay "-" at 140.208,47.752 h1.52 r180; Top Overlay "-" at 150.368,47.752 h1.52 r180
J1_socket8: Top Overlay "+" at 194.818,47.752 h1.52 r180; Top Overlay "+" at 184.658,47.752 h1.52 r180; Top Overlay "+" at 174.498,47.752 h1.52 r180; Top Overlay "+" at 164.338,47.752 h1.52 r180; Top Overlay "ADC" at 175.176,44.704 h1.02; Top Overlay "LOADCELL" at 162.477,44.704 h1.02; Top Overlay "ADC" at 195.496,44.704 h1.02; Top Overlay "LOADCELL" at 182.797,44.704 h1.02; Top Overlay "-" at 169.418,47.752 h1.52 r180; Top Overlay "-" at 179.578,47.752 h1.52 r180; Top Overlay "-" at 189.738,47.752 h1.52 r180; Top Overlay "-" at 199.898,47.752 h1.52 r180